# Altium PCB FlameClock_1.1.PcbDoc (part 2 of 2)
Units mm, origin at the board's own origin, x right, y up, seen from the top; angles counter-clockwise.
Board outline 139.1 x 139.1 mm, 2 copper layers (Top, Bottom); 164 components, 272 nets, 674 pads, 352 vias.
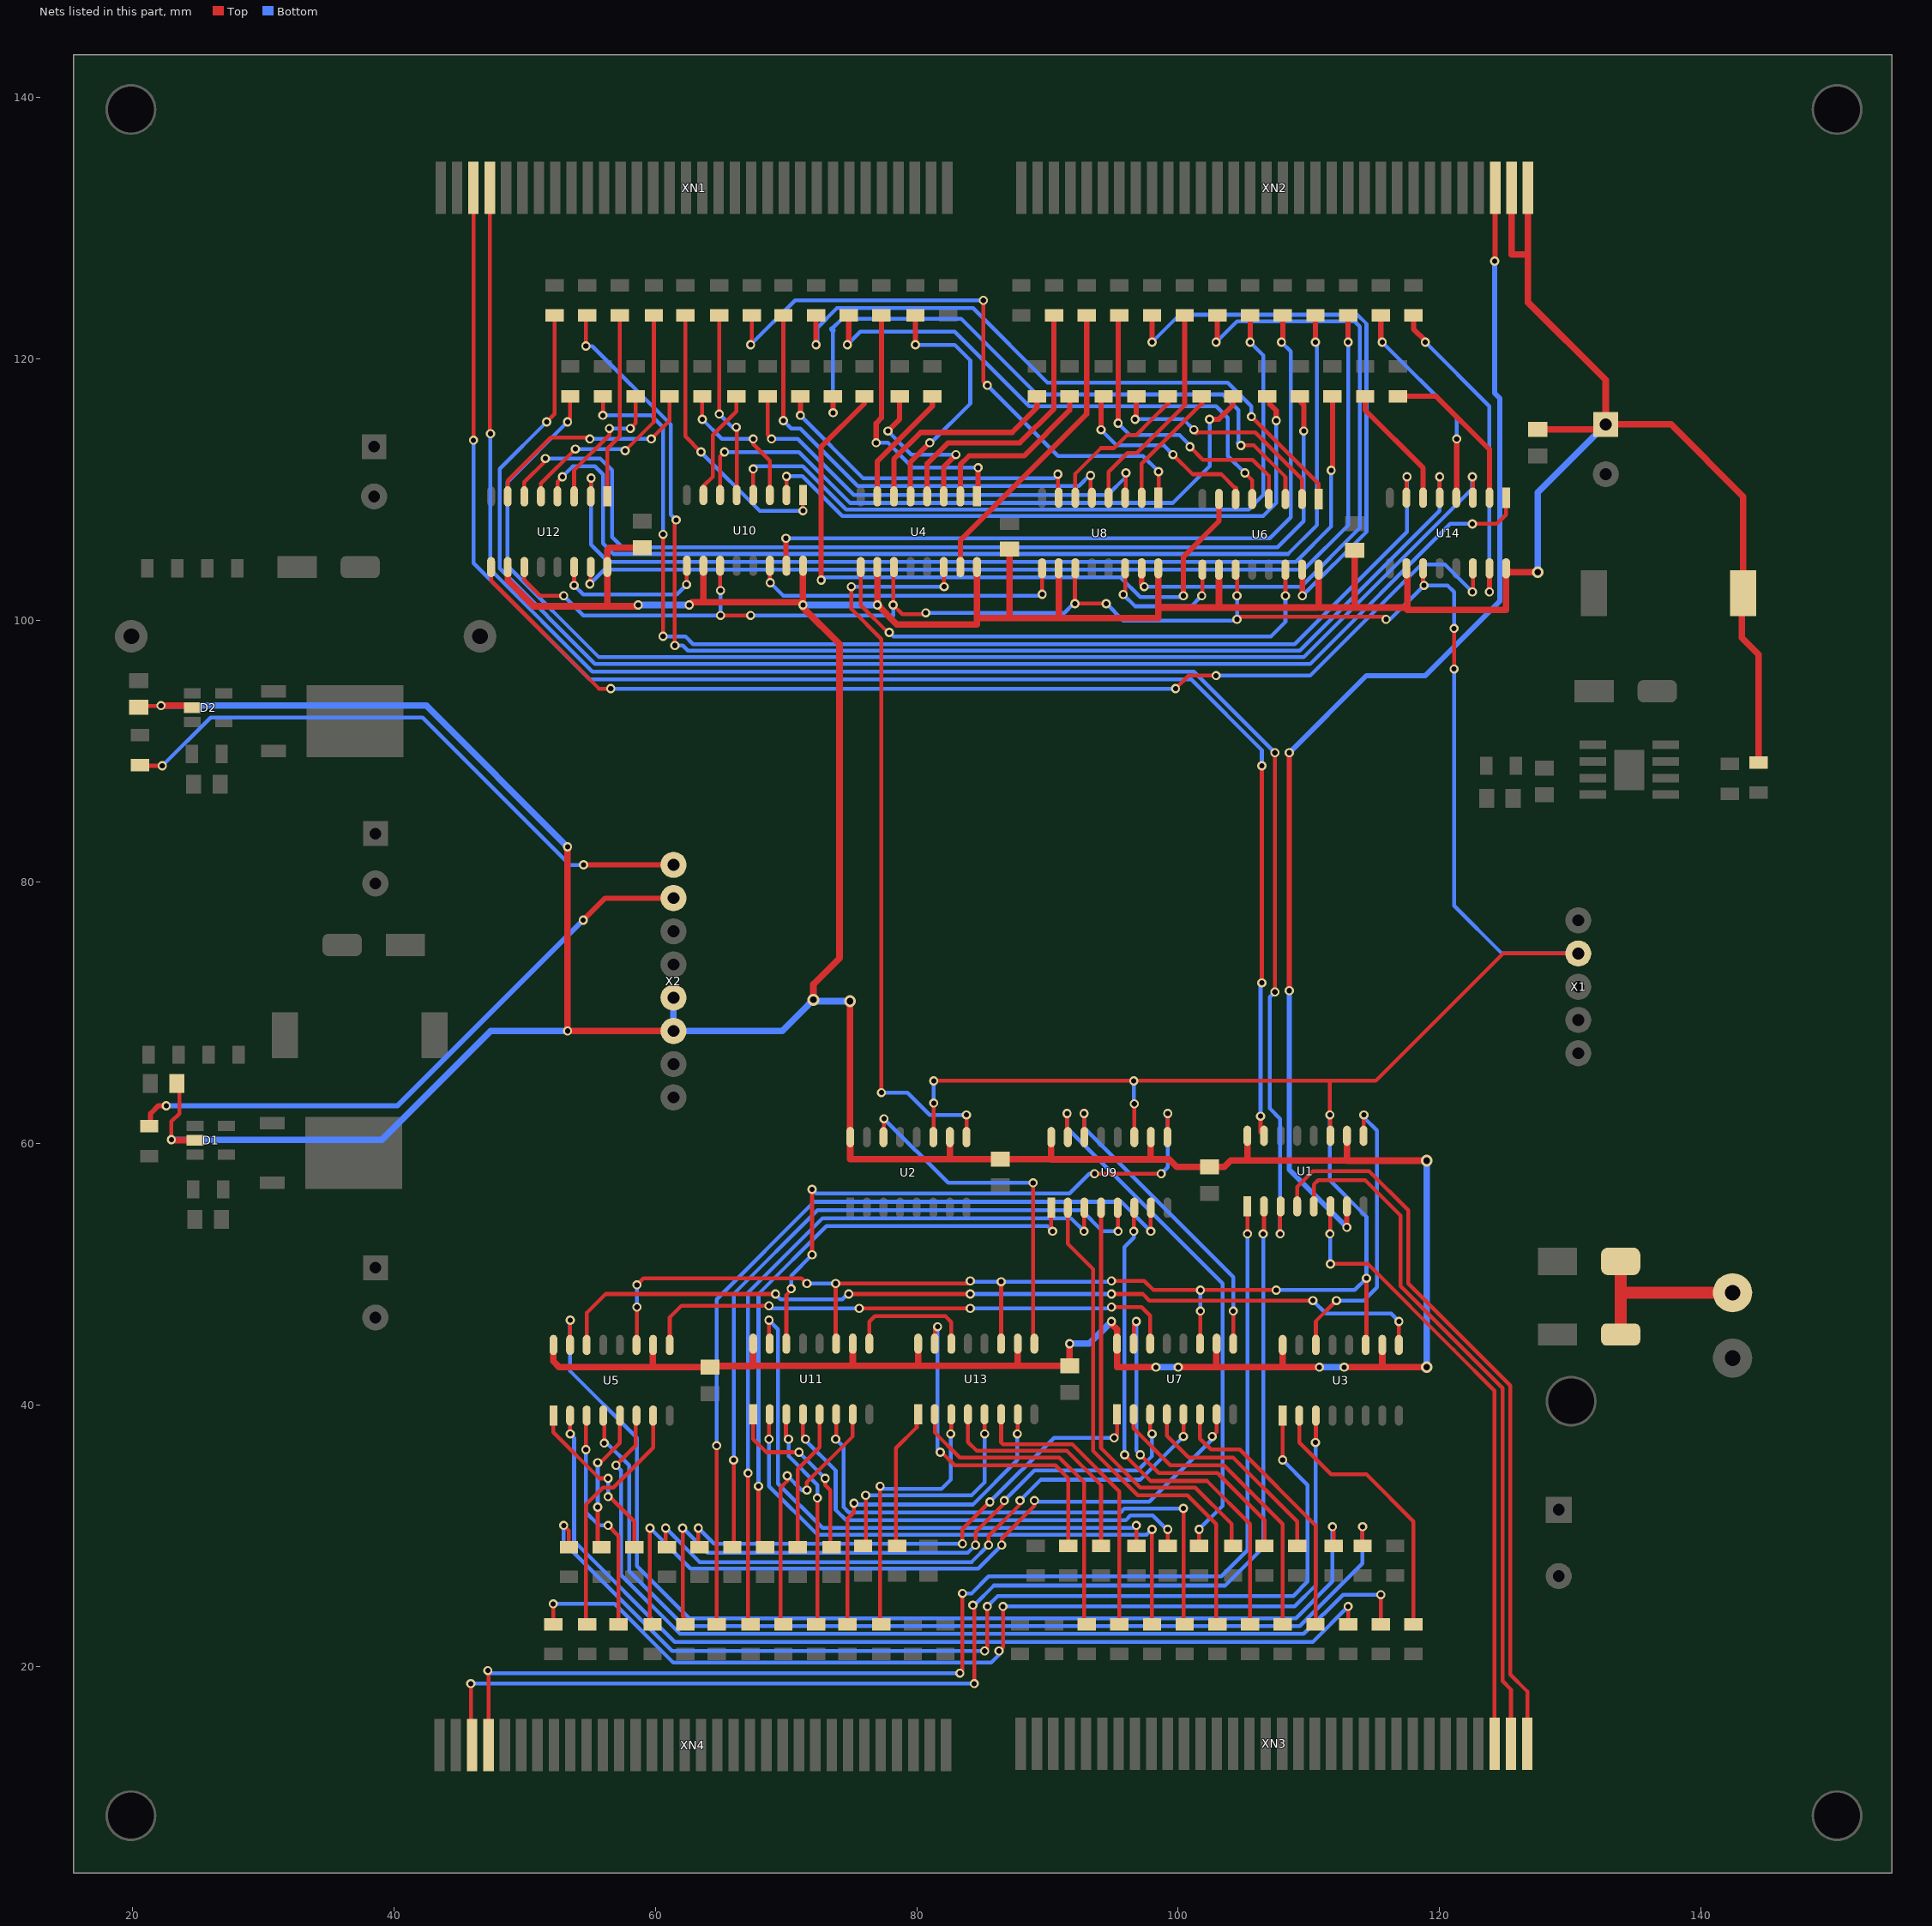
[diagram p2: the nets of this part, all layers, seen from the top]

## Via types
v1: diameter 0.7, hole 0.4, Top to Bottom, 340 vias
v2: diameter 0.9, hole 0.5, Top to Bottom, 12 vias

## Nets (pads, with @x,y where several pads share a name; then routed paths per layer and width w, separated by ;. In a path a pad name is that pad's centre, name@x,y a point inside that pad or via, vN(x,y) a via of type N, cw(c..) or ccw(c..) an arc to the next point about the centre after c; other vN are vias at no path point) (continued)
NetR10_2: R10.2 U3.1 | length 81
  Top w0.3: v1(53,30.8) 53.4,30.4 R10.2@53.4,29.143 ; v1(85.2,21.2) 85.4,21.4 v1(85.4,24.6) ; v1(107.99,35.81) U3.1@107.99,39.2
  Bottom w0.3: v1(53,30.8) 53,29.5 61.3,21.2 v1(85.2,21.2) ; v1(85.4,24.6) 86.2,25.4 108.8,25.4 109.9,26.5 109.9,33.9 v1(107.99,35.81)
NetR11_2: R11.2 U4.15 | length 23.3
  Top w0.4: U4.15@83.34,104.1 83.34,106.14 93,115.8 R11.2@93,123.357
NetR12_2: R12.2 U3.2 | length 21.2
  Top w0.3: U3.2@109.26,39.2 109.26,37.14 111.7,34.7 114.4,34.7 118,31.1 R12.2@118,23.243
NetR13_2: R13.2 U4.1 | length 20.8
  Top w0.4: v1(76.9,113.6) 76.9,115.1 77.3,115.5 R13.2@77.3,123.357 ; U4.1@84.61,109.5 84.6,109.51 84.7,109.61 v1(84.7,111.7)
  Bottom w0.3: v1(76.9,113.6) 77.8,113.6 79.7,111.7 v1(84.7,111.7)
NetR14_2: R14.2 U3.3 | length 79.2
  Top w0.3: R14.2@52.2,23.243 v1(52.2,24.8) ; v1(86.3,21.2) 86.6,21.5 v1(86.6,24.6) ; v1(110.5,37.14) 110.53,37.17 U3.3@110.53,39.2
  Bottom w0.3: v1(52.2,24.8) 56.9,24.8 61.4,20.3 85.7,20.3 86.3,20.9 v1(86.3,21.2) ; v1(86.6,24.6) 108.9,24.6 110.5,26.2 v1(110.5,37.14)
NetR15_2: R15.2 U4.2 | length 13.6
  Top w0.4: U4.2@83.34,109.5 83.34,111.94 84,112.6 88.2,112.6 91.7,116.1 R15.2@91.7,117.157
NetR16_2: R16.2 U4.3 | length 12.7
  Top w0.4: v1@77.9,114.5 v1(77.8,114.5) 78.7,115.4 R16.2@78.7,117.157 ; U4.3@82.07,109.5 82.07,111.77 v1(83,112.7)
  Bottom w0.3: v1(77.8,114.5) 79.6,112.7 v1(83,112.7)
NetR17_2: R17.2 U4.4 | length 21.1
  Top w0.4: U4.4@80.8,109.5 80.8,112 82.4,113.6 87.9,113.6 90.5,116.2 R17.2@90.5,123.357
NetR18_2: R18.2 U4.5 | length 19.3
  Top w0.4: U4.5@79.53,109.5 79.5,109.53 79.5,112.1 v1(81,113.6) ; v1(79.9,121.1) R18.2@79.9,123.357
  Bottom w0.3: v1(79.9,121.1) 82.9,121.1 84.1,119.9 84.1,116.598 v1@81.102,113.6
  Bottom w0.4: v1(81,113.6) v1@81.102,113.6
NetR19_2: R19.2 U4.6 | length 16.3
  Top w0.4: U4.6@78.26,109.5 78.26,112.36 80.3,114.4 87.3,114.4 89.2,116.3 R19.2@89.2,117.157
NetR20_2: R20.2 U4.7 | length 9.4
  Top w0.4: U4.7@76.99,109.5 76.99,112.19 81.2,116.4 R20.2@81.2,117.157
NetR21_2: R21.2 U5.15 | length 84.5
  Top w0.3: U5.15@53.49,44.6 53.5,44.61 v1(53.5,46.5) ; v1(111.8,30.7) 111.9,30.6 R21.2@111.9,29.243
  Bottom w0.3: v1(53.5,46.5) 53.5,42.6 58.6,37.5 58.6,27.7 62.6,23.7 109,23.7 111.8,26.5 v1(111.8,30.7)
NetR22_2: R22.2 U5.1 | length 13.1
  Top w0.3: U5.1@52.22,39.2 52.22,37.913 55.733,34.4 v1(56.4,34.4) ; v1(56.4,33) 56.5,33 58.4,31.1 R22.2@58.4,29.143
  Bottom w0.3: v1(56.4,33) v1(56.4,34.4)
NetR23_2: R23.2 U6.15 | length 44.7
  Top w0.4: v1(98,121.3) 97.9,121.3 98,121.4 R23.2@98,123.357 ; U6.15@109.47,103.9 109.4,103.83 109.5,103.73 v1(109.5,101.9)
  Bottom w0.3: v1(98,121.3) 100.1,123.4 113.707,123.4 114.4,122.707 114.4,106.8 v1(109.5,101.9)
NetR24_2: R24.2 U5.2 | length 74.6
  Top w0.3: U5.2@53.49,39.2 53.5,39.19 v1(53.5,37.8) ; R24.2@113,23.243 v1(113,24.6)
  Bottom w0.3: v1(53.5,37.8) 53.8,37.5 53.8,29.6 61.5,21.9 110.3,21.9 v1(113,24.6)
NetR25_2: R25.2 U6.1 | length 49.8
  Top w0.3: v1(105.6,115.6) 110.74,110.46 U6.1@110.74,109.3
  Top w0.4: v1(72.3,121.1) R25.2@72.3,123.357
  Bottom w0.3: v1@72.4,121.2 72.4,122.4 73.9,123.9 84.3,123.9 90,118.2 103.8,118.2 105.6,116.4 v1(105.6,115.6)
  Bottom w0.4: v1(72.3,121.1) v1@72.4,121.2
NetR26_2: R26.2 U5.3 | length 17.4
  Top w0.3: v1(54.7,36.6) 54.7,39.14 U5.3@54.76,39.2 ; v1(56.4,30.8) 57.2,30 R26.2@57.2,23.243
  Bottom w0.3: v1(54.7,36.6) 54.7,31.8 55.7,30.8 v1(56.4,30.8)
NetR27_2: R27.2 U6.2 | length 18
  Top w0.3: v1@101.4,114.4 105.9,114.4 109.47,110.83 U6.2@109.47,109.3
  Top w0.4: v1(96.7,115.4) 96.7,115.5 96.8,115.6 R27.2@96.8,117.157 ; v1(101.2,114.6) v1@101.4,114.4
  Bottom w0.3: v1(96.7,115.4) 100.4,115.4 v1(101.2,114.6)
NetR28_2: R28.2 U5.4 | length 76.9
  Top w0.3: U5.4@56.03,39.2 56.1,39.13 v1(56.1,37.1) ; R28.2@114.1,29.243 v1(114.1,30.7)
  Bottom w0.3: v1(56.1,37.1) 56.29,37.1 58,35.39 58,27.3 62.2,23.1 109.3,23.1 114.1,27.9 114.1,28.1 v1(114.1,30.7)
NetR29_2: R29.2 U6.3 | length 50.9
  Top w0.3: v1(104.8,113.4) 105.8,113.4 108.2,111 U6.3@108.2,109.3
  Top w0.4: v1(73.6,115.9) R29.2@73.6,117.157
  Bottom w0.3: 73.5,122.3 74.3,123.1 83.4,123.1 89.2,117.3 103.4,117.3 104.6,116.1 v1@104.6,113.6 ; v1(73.6,115.9) 73.6,122.2
  Bottom w0.4: 73.5,122.3 73.6,122.2 ; v1@104.6,113.6 v1(104.8,113.4)
NetR30_2: R30.2 U5.5 | length 11
  Top w0.3: v1(55.6,32.2) 55.6,29.443 R30.2@55.9,29.143 ; v1(55.6,35.6) 55.8,35.6 57.3,37.1 U5.5@57.3,39.2
  Bottom w0.3: v1(55.6,32.2) v1(55.6,35.6)
NetR31_2: R31.2 U6.4 | length 23.3
  Top w0.3: v1(100.9,113.3) 101.9,112.3 105.7,112.3 106.93,111.07 U6.4@106.93,109.3
  Top w0.4: v1(95.4,115.1) 95.4,123.257 R31.2@95.5,123.357
  Bottom w0.3: v1(95.4,115.1) 96.3,114.2 100.1,114.2 v1@100.9,113.4
  Bottom w0.4: v1(100.9,113.3) v1@100.9,113.4
NetR32_2: R32.2 U5.6 | length 76.5
  Top w0.3: v1(57,35.4) 58.5,36.9 58.5,39.13 U5.6@58.57,39.2 ; R32.2@115.5,23.243 v1(115.5,25.5)
  Bottom w0.3: v1(57,35.4) 57.4,35 57.4,27 61.9,22.5 109.6,22.5 112.6,25.5 v1(115.5,25.5)
NetR33_2: R33.2 U6.5 | length 41.5
  Top w0.3: v1(105.1,111.3) 105.66,110.74 U6.5@105.66,109.3
  Top w0.4: v1(74.7,121.1) 74.7,121.2 74.8,121.3 R33.2@74.8,123.357
  Bottom w0.3: v1(74.7,121.1) 75.7,122.1 82.9,122.1 88.6,116.4 102.9,116.4 103.8,115.5 103.8,112.6 v1(105.1,111.3)
NetR34_2: R34.2 U5.7 | length 18.6
  Top w0.3: R34.2@54.7,23.243 54.7,32.4 56,33.7 56.8,33.7 59.84,36.74 U5.7@59.84,39.2
NetR35_2: R35.2 U6.6 | length 15.6
  Top w0.3: v1(99.6,112.7) 101.1,111.2 103.3,111.2 104.39,110.11
  Top w0.4: v1(94.1,114.6) 94.1,116.957 R35.2@94.3,117.157 ; U6.6@104.39,109.3 104.39,110.11
  Bottom w0.3: v1(94.1,114.6) 95.3,113.4 98.9,113.4 v1(99.6,112.7)
NetR36_2: R36.2 U6.7 | length 52.4
  Top w0.4: v1(72.7,103.1) 72.7,113.3 76,116.6 R36.2@76,117.157 ; v1(100.4,101.9) 100.4,104.9 103.12,107.62 U6.7@103.12,109.3
  Bottom w0.3: v1(72.7,103.1) 72.9,103.3 95.6,103.3 97.1,101.8 100.3,101.8 v1(100.4,101.9)
NetR37_2: R37.2 U7.15 | length 25.7
  Top w0.3: U7.15@96.59,44.7 96.5,44.79 96.6,44.89 96.6,46.2 v1(96.8,46.4) ; v1(97.1,36.2) 98.5,34.8 103,34.8 106.6,31.2 R37.2@106.6,29.243
  Bottom w0.3: v1(96.8,46.4) 96.8,36.5 v1(97.1,36.2)
NetR38_2: R38.2 U7.1 | length 39.8
  Top w0.3: v1(63.3,30.6) 63.3,29.443 63.2,29.343 R38.2@63.4,29.143 ; v1(83.5,29.4) 83.5,30.5 v1(85.6,32.6) ; v1(95.1,37.5) 95.32,37.72 U7.1@95.32,39.3
  Bottom w0.3: v1(63.3,30.6) 64.5,29.4 v1(83.5,29.4) ; v1(85.6,32.6) 90.5,37.5 v1(95.1,37.5)
NetR39_2: R39.2 U8.15 | length 49.2
  Top w0.4: U8.15@97.21,104 97.2,103.99 97.2,102.8 v1(97.4,102.6) ; v1(102.9,121.3) 103,121.4 R39.2@103,123.357
  Bottom w0.3: v1(97.4,102.6) 109.4,102.6 113.9,107.1 113.9,122.5 113.5,122.9 104.5,122.9 v1(102.9,121.3)
NetR40_2: R40.2 U7.2 | length 23.2
  Top w0.3: U7.2@96.59,39.3 96.59,38.21 99.4,35.4 103.5,35.4 108,30.9 R40.2@108,23.243
NetR41_2: R41.2 U8.1 | length 46
  Top w0.3: v1(67.3,121.1) 67.4,121.2 R41.2@67.4,123.357 ; v1(85.1,124.5) 85.1,118.3 v1(85.4,118) ; U8.1@98.48,109.4 98.5,109.42 v1(98.5,111.4)
  Bottom w0.3: v1(67.3,121.1) 70.7,124.5 v1(85.1,124.5) ; v1(85.4,118) 90.8,112.6 97.3,112.6 v1(98.5,111.4)
NetR42_2: R42.2 U7.3 | length 51.3
  Top w0.3: v1(62.1,30.6) 62.1,23.843 62.4,23.543 62.2,23.343 R42.2@62.3,23.243 ; v1(84.5,29.3) 84.5,30.3 86.7,32.5 v1(86.7,32.7) ; U7.3@97.86,39.3 97.86,37.94 v1(98,37.8)
  Bottom w0.3: v1(62.1,30.6) 64,28.7 83.9,28.7 v1(84.5,29.3) ; v1(86.7,32.7) 89,35 96.9,35 98,36.1 v1(98,37.8)
NetR43_2: R43.2 U8.2 | length 9.7
  Top w0.3: U8.2@97.21,109.4 97.21,112 101.8,116.59
  Top w0.4: 101.8,116.59 R43.2@101.8,117.157
NetR44_2: R44.2 U7.4 | length 16.2
  Top w0.3: U7.4@99.13,39.3 99.13,37.67 100.8,36 104.2,36 109.1,31.1 R44.2@109.1,29.243
NetR45_2: R45.2 U8.3 | length 35.1
  Top w0.3: R45.2@68.6,117.157 68.6,114.2 v1(68.9,113.9) v1@69,113.8 ; U8.3@96,109.46 v1(96,111.3)
  Bottom w0.3: v1(68.9,113.9) 70.9,113.9 75.2,109.6 94.6,109.6 96,111 v1(96,111.3)
NetR46_2: R46.2 U7.5 | length 48.4
  Top w0.3: v1(60.8,30.6) 60.8,29.243 R46.2@60.9,29.143 ; v1(85.5,29.3) 85.5,30 87.9,32.4 v1(87.9,32.7) ; v1(100.4,37.6) U7.5@100.4,39.3
  Bottom w0.3: v1(60.8,30.6) 63.4,28 84.2,28 v1(85.5,29.3) ; v1(87.9,32.7) 89.5,34.3 97.1,34.3 v1(100.4,37.6)
NetR47_2: R47.2 U8.4 | length 16.8
  Top w0.3: U8.4@94.67,109.4 94.67,111.37 96.128,112.828 96.828,112.828 100.5,116.5
  Top w0.4: 100.5,116.5 R47.2@100.5,123.357
NetR48_2: R48.2 U7.6 | length 21
  Top w0.3: U7.6@101.67,39.3 101.67,37.43 102.5,36.6 104.7,36.6 110.5,30.8 R48.2@110.5,23.243
NetR49_2: R49.2 U8.5 | length 35.7
  Top w0.3: v1(69.8,115.3) R49.2@69.8,123.357 ; U8.5@93.3,109.5 v1(93.3,111.1)
  Top w0.4: U8.5@93.3,109.5 U8.5@93.4,109.4
  Bottom w0.3: v1(69.8,115.3) 70.4,114.7 71.1,114.7 75.5,110.3 92.4,110.3 v1@93.2,111.1
  Bottom w0.4: v1@93.2,111.1 v1(93.3,111.1)
NetR50_2: R50.2 U7.7 | length 58.5
  Top w0.3: v1(59.6,30.6) 59.6,23.443 R50.2@59.8,23.243 ; v1(86.5,29.3) 86.5,29.8 89,32.3 v1(89,32.7) ; v1(102.6,37.6) 102.94,37.94 U7.7@102.94,39.3
  Bottom w0.3: v1(59.6,30.6) 62.7,27.5 84.7,27.5 v1(86.5,29.3) ; v1(89,32.7) 89.1,32.6 97.8,32.6 102.6,37.4 v1(102.6,37.6)
NetR51_2: R51.2 U8.6 | length 11.7
  Top w0.3: U8.6@92.13,109.4 92.13,111.23 94.1,113.2 95.1,113.2 96.1,114.2 96.8,114.2 97.9,115.3 99.2,116.6
  Top w0.4: 99.2,116.6 R51.2@99.2,117.157
NetR52_2: R52.2 U8.7 | length 25.1
  Top w0.3: U8.7@90.8,109.46 v1(90.8,111.2)
  Top w0.4: v1(71.1,115.7) R52.2@71.1,117.157 ; U8.7@90.8,109.46 U8.7@90.86,109.4
  Bottom w0.3: v1(71.1,115.7) 75.9,110.9 90.5,110.9 v1(90.8,111.2)
NetR53_2: R53.2 U9.15 | length 40.6
  Top w0.3: v1(91.5,62.3) 91.5,60.56 U9.15@91.56,60.5 ; R53.2@101.6,29.243 v1(101.6,30.5)
  Bottom w0.3: v1(91.5,62.3) 91.5,61.2 103.4,49.3 103.4,32.3 v1(101.6,30.5)
NetR54_2: R54.2 U9.1 | length 46.2
  Top w0.3: v1(67.9,33.8) 67.9,29.643 R54.2@68.4,29.143 ; U9.1@90.29,55.1 90.29,53.41 v1(90.4,53.3)
  Bottom w0.3: v1(67.9,33.8) 67.9,48.5 73.1,53.7 90,53.7 v1(90.4,53.3)
NetR55_2: R55.2 U10.15 | length 57.2
  Top w0.4: v1(70,106.3) 70,104.24 U10.15@70.04,104.2 ; v1(107.9,121.3) 108,121.3 R55.2@108,123.357
  Bottom w0.3: v1(70,106.3) 107,106.3 108.6,107.9 108.6,120.6 v1(107.9,121.3)
NetR56_2: R56.2 U9.2 | length 38.8
  Top w0.3: U9.2@91.56,55.1 91.56,52.34 93.5,50.4 93.5,36.5 96.9,33.1 100.7,33.1 102.9,30.9 102.9,23.343 R56.2@103,23.243
NetR57_2: R57.2 U10.1 | length 21.8
  Top w0.3: R57.2@62.3,123.357 62.3,114.1 v1(63.5,112.9) ; v1(71.3,108.4) 71.3,109.59 U10.1@71.31,109.6
  Bottom w0.3: v1(63.5,112.9) 68,108.4 v1(71.3,108.4)
NetR58_2: R58.2 U9.3 | length 55.7
  Top w0.3: v1(67.1,34.8) 67.1,23.443 R58.2@67.3,23.243 ; v1(92.8,53.3) 92.8,55.07 U9.3@92.83,55.1
  Bottom w0.3: v1(67.1,34.8) 67.1,48.6 72.8,54.3 91.8,54.3 v1(92.8,53.3)
NetR59_2: R59.2 U10.2 | length 49
  Top w0.3: U10.2@70.04,109.6 v1(70.04,111.04)
  Top w0.4: R59.2@106.8,117.157 107,116.957 107,116.557 107.5,116.057 v1(107.5,115.3)
  Bottom w0.3: v1(70.04,111.04) 71.26,111.04 74.3,108 106.5,108 107.5,109 v1(107.5,115.3)
NetR60_2: R60.2 U9.4 | length 32.5
  Top w0.3: U9.4@94.1,55.1 94.1,36.7 97.1,33.7 101.3,33.7 104.1,30.9 R60.2@104.1,29.243
NetR61_2: R61.2 U10.3 | length 11.1
  Top w0.3: v1(63.6,115.4) R61.2@63.6,117.157 ; v1(67.5,113.9) 67.5,113.5 68.77,112.23 U10.3@68.77,109.6
  Bottom w0.3: v1(63.6,115.4) 65.1,113.9 v1(67.5,113.9)
NetR62_2: R62.2 U9.5 | length 53.9
  Top w0.3: R62.2@65.9,29.143 66,29.243 v1(66,35.8) ; U9.5@95.37,55.1 95.4,55.07 v1(95.4,53.3)
  Bottom w0.3: v1(66,35.8) 66,48.5 72.4,54.9 92.6,54.9 94.2,53.3 v1(95.4,53.3)
NetR63_2: R63.2 U10.4 | length 57.2
  Top w0.3: U10.4@67.5,109.6 v1(67.5,111.6)
  Top w0.4: v1(105.5,121.3) 105.6,121.3 105.5,121.4 R63.2@105.5,123.357
  Bottom w0.3: v1@67.5,111.7 67.6,111.8 71.3,111.8 74.6,108.5 105.4,108.5 106.5,109.6 106.5,120.3 v1(105.5,121.3)
NetR64_2: R64.2 U9.6 | length 38.7
  Top w0.3: v1(95.9,36.2) 97.9,34.2 102.2,34.2 105.5,30.9 R64.2@105.5,23.243 ; v1(96.6,53.3) 96.6,55.06 U9.6@96.64,55.1
  Bottom w0.3: v1(95.9,36.2) 95.9,52.1 96.6,52.8 v1(96.6,53.3)
NetR65_2: R65.2 U10.5 | length 14.5
  Top w0.3: v1(64.9,115.8) R65.2@64.9,123.357 ; v1(66.2,114.8) 66.23,114.77 U10.5@66.23,109.6
  Bottom w0.3: v1(64.9,115.8) 65.9,114.8 v1(66.2,114.8)
NetR66_2: R66.2 U9.7 | length 63.9
  Top w0.3: R66.2@64.7,23.243 v1(64.7,36.9) ; v1(97.9,53.3) 97.9,55.09 U9.7@97.91,55.1
  Bottom w0.3: v1(64.7,36.9) 64.7,48.1 72.15,55.55 95.65,55.55 v1(97.9,53.3)
NetR67_2: R67.2 U10.6 | length 49.8
  Top w0.3: U10.6@64.96,109.6 64.96,112.56 v1(65.3,112.9)
  Top w0.4: v1(102.4,115.4) 103.1,115.4 104.2,116.5 R67.2@104.2,117.157
  Bottom w0.3: v1(65.3,112.9) 71,112.9 74.9,109 99.6,109 102.4,111.8 v1(102.4,115.4)
NetR68_2: R68.2 U10.7 | length 8.6
  Top w0.3: U10.7@63.69,109.6 63.69,110.29 64.4,111 64.4,114.2 66.2,116 R68.2@66.2,117.157
NetR69_2: R69.2 U11.15 | length 45.1
  Top w0.3: v1(68.7,46.5) 68.7,44.76 U11.15@68.76,44.7 ; R69.2@96.8,29.243 v1(96.8,30.8)
  Bottom w0.3: v1(68.7,46.5) 69.4,45.8 69.4,34 72.8,30.6 96.6,30.6 v1(96.8,30.8)
NetR70_2: R70.2 U11.1 | length 14.1
  Top w0.3: U11.1@67.49,39.3 67.49,37.41 68.5,36.4 v1(71,36.4) ; v1(73,34.4) 73,33.9 73.4,33.5 R70.2@73.4,29.143
  Bottom w0.3: v1(71,36.4) v1(73,34.4)
NetR71_2: R71.2 U12.15 | length 77.2
  Top w0.3: v1(55,102.8) 55.07,102.87 U12.15@55.07,104.1
  Top w0.4: v1(113,121.3) R71.2@113,123.357
  Bottom w0.3: v1(55,102.8) 56.1,103.9 109.6,103.9 113,107.3 v1(113,121.3)
NetR72_2: R72.2 U11.2 | length 43.2
  Top w0.3: v1(68.7,37.4) U11.2@68.7,38.74 ; R72.2@98,23.243 v1(98,30.5)
  Bottom w0.3: v1(68.7,37.4) 68.7,33.8 72.4,30.1 97.6,30.1 v1(98,30.5)
NetR73_2: R73.2 U12.1 | length 14.3
  Top w0.3: U12.1@56.34,109.5 56.34,113.14 57.3,114.1 R73.2@57.3,123.357
NetR74_2: R74.2 U11.3 | length 17.2
  Top w0.3: U11.3@70.03,39.3 70,39.27 70,37.6 v1(70.2,37.4) ; R74.2@72.3,23.243 72.2,23.343 72.4,23.543 v1(72.4,32.9)
  Bottom w0.3: v1(70.2,37.4) 70.2,36.1 72.4,33.9 v1(72.4,32.9)
NetR75_2: R75.2 U12.2 | length 74.9
  Top w0.3: v1@55,111 v1(55.1,110.9) 55.1,109.53 U12.2@55.07,109.5
  Top w0.4: v1(111.7,111.5) 111.8,111.6 R75.2@111.8,117.157
  Bottom w0.3: v1(55.1,110.9) 55.1,105.8 56.4,104.5 109,104.5 111.7,107.2 v1(111.7,111.5)
NetR76_2: R76.2 U11.4 | length 36
  Top w0.3: U11.4@71.3,39.3 71.3,37.6 v1(71.5,37.4) ; R76.2@99.2,29.243 99.1,29.343 99.2,29.443 v1(99.2,30.5)
  Bottom w0.3: v1(71.5,37.4) 71.5,37.3 73.8,35 73.8,32 74.6,31.2 96,31.2 96.35,31.55 98.05,31.55 99.1,30.5 v1(99.2,30.5)
NetR77_2: R77.2 U12.3 | length 10.5
  Top w0.3: U12.3@53.8,109.5 53.8,111.5 56.5,114.2 v1(56.5,114.7) ; v1(58.1,114.7) 58.5,115.1 R77.2@58.5,117.157
  Bottom w0.3: v1(56.5,114.7) v1(58.1,114.7)
NetR78_2: R78.2 U11.5 | length 10.8
  Top w0.3: R78.2@70.9,29.143 70.9,35.1 72.57,36.77 U11.5@72.57,39.3
NetR79_2: R79.2 U12.4 | length 82.6
  Top w0.3: U12.4@52.53,109.5 52.53,110.63 v1(52.9,111)
  Top w0.4: v1(110.5,121.3) R79.2@110.5,123.357
  Bottom w0.3: v1(52.9,111) 53.7,111.8 55.39,111.8 56,111.19 56,105.9 56.8,105.1 108.4,105.1 110.6,107.3 v1@110.6,121.2
  Bottom w0.4: v1(110.5,121.3) v1@110.6,121.2
NetR80_2: R80.2 U11.6 | length 42.6
  Top w0.3: v1(73.8,37.4) 73.8,37.6 73.84,37.64 U11.6@73.84,39.3 ; v1(100.4,32.1) 100.4,23.343 R80.2@100.5,23.243
  Bottom w0.3: v1(73.8,37.4) 74.4,36.8 74.4,32.2 74.8,31.8 95.6,31.8 95.9,32.1 v1(100.4,32.1)
NetR81_2: R81.2 U12.5 | length 19.8
  Top w0.3: U12.5@51.26,109.5 51.26,110.486 v1(53.9,113.126) ; v1(57.7,113) 59.9,115.2 R81.2@59.9,123.357
  Bottom w0.3: v1(53.9,113.126) 57.574,113.126 v1(57.7,113)
NetR82_2: R82.2 U11.7 | length 20.9
  Top w0.3: R82.2@69.8,23.243 69.6,23.443 69.6,33.7 70.1,34.2 v1(70.1,34.6) ; v1(71.6,33.5) 71.6,34.1 75.11,37.61 U11.7@75.11,39.3
  Bottom w0.3: v1(70.1,34.6) 71.2,33.5 v1(71.6,33.5)
NetR83_2: R83.2 U12.6 | length 78
  Top w0.3: U12.6@49.99,109.5 49.99,110.59 51.6,112.2 v1(51.6,112.4)
  Top w0.4: R83.2@109.3,117.157 109.121,116.979 109.6,116.5 v1(109.6,114.5)
  Bottom w0.3: v1(51.6,112.4) 55.8,112.4 56.7,111.5 56.7,106.4 57.5,105.6 107.6,105.6 109.6,107.6 v1(109.6,114.5)
NetR84_2: R84.2 U12.7 | length 17.4
  Top w0.3: U12.7@48.72,109.5 48.72,110.72 52,114 54.9,114 v1(55,113.9) ; v1(59.7,113.9) 61.1,115.3 R84.2@61.1,117.157
  Bottom w0.3: v1(55,113.9) v1(59.7,113.9)
NetR85_2: R85.2 U13.15 | length 26.9
  Top w0.3: U13.15@81.38,44.7 81.38,45.78 v1(81.6,46) ; v1(81.8,36.4) 81.9,36.4 82.9,35.4 90.6,35.4 91.6,34.4 R85.2@91.6,29.243
  Bottom w0.3: v1(81.6,46) 81.6,36.6 v1(81.8,36.4)
NetR86_2: R86.2 U13.1 | length 10.8
  Top w0.3: R86.2@78.4,29.243 78.4,36.7 80,38.3 80,39.19 U13.1@80.11,39.3
NetR87_2: R87.2 U14.15 | length 25.4
  Top w0.4: R87.2@118,123.357 118,122.3 118.9,121.4 v1(118.9,121.3) ; v1(123.8,102.2) 123.8,103.99 U14.15@123.81,104
  Bottom w0.3: v1(118.9,121.3) 123.8,116.4 v1(123.8,102.2)
NetR88_2: R88.2 U13.2 | length 25.3
  Top w0.3: U13.2@81.38,39.3 81.38,37.905 83.285,36 90.9,36 92.8,34.1 92.8,23.443 R88.2@93,23.243
NetR89_2: R89.2 U14.1 | length 107.1
  Top w0.3: v1(51.7,115.2) 52.3,115.8 R89.2@52.3,123.357 ; v1(122.5,107.4) 124.367,107.4 125.08,108.113 U14.1@125.08,109.4
  Bottom w0.3: v1(51.7,115.2) 48.1,111.6 48.1,104 55.4,96.7 110.1,96.7 120.8,107.4 v1(122.5,107.4)
NetR90_2: R90.2 U13.3 | length 21.4
  Top w0.3: v1(77.2,33.8) 77.2,23.343 R90.2@77.3,23.243 ; v1(82.6,37.8) 82.65,37.85 U13.3@82.65,39.3
  Bottom w0.3: v1(77.2,33.8) 77.4,33.6 81.9,33.6 82.6,34.3 v1(82.6,37.8)
NetR91_2: R91.2 U14.2 | length 12.4
  Top w0.4: R91.2@116.8,117.157 119.743,117.157 123.81,113.09 U14.2@123.81,109.4
NetR92_2: R92.2 U13.4 | length 18.3
  Top w0.3: U13.4@83.92,39.3 83.92,37.18 84.6,36.5 91.5,36.5 94.1,33.9 R92.2@94.1,29.243
NetR93_2: R93.2 U14.3 | length 99.5
  Top w0.3: v1(53.3,115.2) 53.5,115.4 R93.2@53.5,117.157 ; v1(122.5,111) 122.54,110.96 U14.3@122.54,109.4
  Bottom w0.3: v1(53.3,115.2) 48.7,110.6 48.7,104.2 55.7,97.2 109.6,97.2 122.5,110.1 v1(122.5,111)
NetR94_2: R94.2 U13.5 | length 18.7
  Top w0.3: R94.2@75.9,29.243 76.1,29.443 v1(76.1,33.1) ; U13.5@85.19,39.3 85.19,37.81 v1(85.2,37.8)
  Bottom w0.3: v1(76.1,33.1) 84.2,33.1 85.2,34.1 v1(85.2,37.8)
NetR95_2: R95.2 U14.4 | length 16.1
  Top w0.4: R95.2@115.5,123.357 115.5,121.4 v1(115.6,121.3) ; U14.4@121.2,109.67 121.3,109.77 v1(121.3,113.9)
  Bottom w0.3: v1(115.6,121.3) 121.3,115.6 v1(121.3,113.9)
NetR96_2: R96.2 U13.6 | length 22.9
  Top w0.3: U13.6@86.46,39.3 86.46,37.14 86.6,37 91.9,37 95.5,33.4 R96.2@95.5,23.243
NetR97_2: R97.2 U14.5 | length 95.8
  Top w0.3: v1(54.7,121) 54.7,123.257 R97.2@54.8,123.357 ; v1(61.5,98.1) 61.5,107.6 v1(61.6,107.7) ; U14.5@120,109.4 v1(120,111)
  Bottom w0.3: v1(54.7,121) 55.2,121 61.2,115 61.2,108.1 v1(61.6,107.7) ; v1(61.5,98.1) 62.1,98.1 62.5,97.7 109.3,97.7 120,108.4 v1(120,111)
NetR98_2: R98.2 U13.7 | length 27
  Top w0.3: R98.2@74.7,23.243 74.8,23.343 74.7,23.443 74.7,31.3 75.2,31.8 v1(75.2,32.5) ; v1(87.7,37.8) 87.73,37.83 U13.7@87.73,39.3
  Bottom w0.3: v1(75.2,32.5) 75.3,32.4 84.3,32.4 87.7,35.8 v1(87.7,37.8)
NetR99_2: R99.2 U14.6 | length 9.6
  Top w0.4: R99.2@114.3,117.157 114.3,116.1 118.73,111.67 U14.6@118.73,109.4
NetR100_2: R100.2 U14.7 | length 89
  Top w0.3: v1(56,115.7) R100.2@56,117.157 ; v1(60.6,98.8) v1(60.6,106.6) ; U14.7@117.46,109.4 117.46,110.96 v1(117.5,111)
  Bottom w0.3: v1(56,115.7) 59.7,115.7 60.6,114.8 v1(60.6,106.6) ; v1(60.6,98.8) 62.3,98.8 62.9,98.2 108.9,98.2 117.5,106.8 v1(117.5,111)
NetR113_2: 
NetR118_2: 
NetR123_2: 
NetU1_9: U1.9 U3.14 | length 22.9
  Top w0.3: U3.14@110.53,44.6 110.53,46.43 v1(112.1,48) ; U1.9@114.18,60.6 114.1,60.68 114.2,60.78 v1(114.2,62.2)
  Bottom w0.3: v1(112.1,48) 114.2,48 115.2,49 115.2,61 114.2,62 v1(114.2,62.2)
NetU2_9: U2.9 U4.14 | length 57.2
  Top w0.3: v1(75,102.6) 75,100.9 77.3,98.6 v1(77.3,63.9) ; U4.14@82.07,104.1 82.07,102.63 v1(82.1,102.6) ; v1(83.8,62.2) 83.81,62.19 U2.9@83.81,60.5
  Bottom w0.3: v1(75,102.6) v1(82.1,102.6) ; v1(77.3,63.9) 79.3,63.9 81,62.2 v1(83.8,62.2)
NetU3_9: U3.9 U5.14 | length 68.2
  Top w0.3: U5.14@54.76,44.6 54.76,47.06 56.2,48.5 v1(69.2,48.5) ; v1(74.8,48.5) v1(84.1,48.5) ; v1(94.9,48.5) 97.3,48.5 97.8,48 v1(110.3,48) ; U3.9@116.88,44.6 v1(116.88,46.4)
  Bottom w0.3: v1(69.2,48.5) 69.6,48.1 74.3,48.1 74.7,48.5 v1(74.8,48.5) ; v1(84.1,48.5) v1(94.9,48.5) ; v1(110.3,48) 111.3,47 116.28,47 v1(116.88,46.4)
NetU4_9: U4.9 U6.14 | length 41
  Top w0.3: U4.9@75.72,104.1 75.72,101.18 77.9,99 v1(77.9,99.1) ; v1(108.2,101.9) U6.14@108.2,103.9
  Bottom w0.3: v1(77.9,99.1) 78.2,98.8 107.1,98.8 108.2,99.9 v1(108.2,101.9)
NetU5_9: U5.9 U7.14 | length 41.8
  Top w0.3: U5.9@61.11,44.6 61.11,46.71 62,47.6 v1(68.7,47.6) ; v1(75.6,47.4) v1(84.1,47.4) ; v1(94.9,47.5) 97.2,47.5 97.86,46.84 U7.14@97.86,44.7
  Bottom w0.3: v1(68.7,47.6) 68.9,47.4 v1(75.6,47.4) ; v1(84.1,47.4) 94.8,47.4 v1(94.9,47.5)
NetU6_9: U6.9 U8.14 | length 10.8
  Top w0.3: v1(95.8,102) 95.94,102.14 U8.14@95.94,104 ; v1(101.8,101.9) 101.85,101.95 U6.9@101.85,103.9
  Bottom w0.3: v1(95.8,102) 96.7,101.1 101,101.1 v1(101.8,101.9)
NetU7_9: U7.9 U9.14 | length 24.1
  Top w0.3: v1(92.8,62.3) 92.8,60.53 U9.14@92.83,60.5 ; U7.9@104.21,44.7 v1(104.21,47.2)
  Bottom w0.3: v1(92.8,62.3) 92.8,61.2 104.21,49.79 v1(104.21,47.2)
NetU8_9: U8.9 U10.14 | length 24.6
  Top w0.3: U10.14@68.77,104.2 68.77,102.93 v1(68.8,102.9) ; U8.9@89.59,104 89.59,102.01 v1(89.6,102.02)
  Bottom w0.3: v1(68.8,102.9) 69.8,101.9 89.48,101.9 v1(89.6,102.02)
NetU9_9: U9.9 U11.14 | length 46.7
  Top w0.3: U11.14@70.03,44.7 70.03,48.43 70.4,48.8 v1(70.4,48.9) ; v1(72,51.5) v1(72,56.5) ; v1(93.6,57.7) v1(98.7,57.7) ; U9.9@99.18,60.5 99.2,60.52 v1(99.2,62.3)
  Bottom w0.3: v1(70.4,48.9) 70.4,49.9 v1(72,51.5) ; v1(72,56.5) 72.3,56.2 91.7,56.2 93.2,57.7 v1(93.6,57.7) ; v1(98.7,57.7) 99.2,58.2 v1(99.2,62.3)
NetU10_9: U10.9 U12.14 | length 12.1
  Top w0.3: v1(53.8,102.7) U12.14@53.8,104.1 ; v1(62.4,102.76) 62.42,102.78 U10.9@62.42,104.2
  Bottom w0.3: v1(53.8,102.7) 54.5,102 61.64,102 v1(62.4,102.76)
NetU11_9: U11.9 U13.14 | length 10
  Top w0.3: U11.9@76.38,44.7 76.38,46.38 76.8,46.8 82.2,46.8 82.65,46.35 U13.14@82.65,44.7
NetU12_9: U12.9 U14.14 | length 86.1
  Top w0.3: U12.9@47.45,104.1 47.45,103.05 55.7,94.8 v1(56.6,94.8) ; v1(99.8,94.8) 100.8,95.8 v1(102.9,95.8) ; v1(122.5,102.2) 122.54,102.24 U14.14@122.54,104
  Bottom w0.3: v1(56.6,94.8) v1(99.8,94.8) ; v1(102.9,95.8) 110.1,95.8 118.6,104.3 120.4,104.3 v1(122.5,102.2)
NetVD1_2: VD1.2 VD5.2 X3.1 | length 14.5
  Top w0.9: VD5.2@133.84,45.4 133.84,48.6 ; VD1.2@133.84,51 VD1.2@133.84,50.528 ; VD1.2@134.112,50.8 VD1.2@133.84,50.528 ; X3.1@142.4,48.6 133.84,48.6 ; 133.84,48.6 VD1.2@133.84,50.528
PGC: 
PGD: 
"Register conn": U2.14 U13.9 | length 27.2
  Top w0.3: U2.14@77.46,60.5 77.5,60.54 v1(77.5,61.9) ; v1(88.9,57) 88.9,44.8 U13.9@89,44.7
  Bottom w0.3: v1(77.5,61.9) 82.4,57 v1(88.9,57)
RX_PROG: 
Shift: U1.11 U2.11 U3.11 U4.11 U5.11 U6.11 U7.11 U8.11 U9.11 U10.11 U11.11 U12.11 U13.11 U14.11 X1.2 | length 286.8
  Top w0.3: U12.11@49.99,104.1 49.99,103.11 51.2,101.9 v1(53,101.9) ; U5.11@58.57,44.6 58.6,44.63 v1(58.6,47.5) ; v1@58.6,49.4 v1(58.6,49.2) 59.1,49.7 71.2,49.7 v1(71.6,49.3) ; U10.11@64.96,104.2 64.96,102.34 v1(65,102.3) ; v1(65,100.4) v1(67.3,100.4) ; U11.11@73.84,44.7 73.8,44.74 v1(73.8,49.3) 83.9,49.3 v1(84.1,49.5) ; U4.11@78.26,104.1 78.2,104.04 v1(78.2,101.2) 78.9,100.5 80.6,100.5 v1(80.7,100.6) ; U2.11@81.27,60.5 81.3,60.53 v1(81.3,63.1) ; v1(81.3,64.8) v1(96.6,64.8) 111.7,64.8 ; U13.11@86.46,44.7 v1(86.46,49.44) ; U8.11@92.13,104 92.1,103.97 92.2,103.87 92.1,103.77 v1(92.1,101.3) v1(94.5,101.3) ; v1(94.9,49.5) 97.4,49.5 98.1,48.8 v1(101.7,48.8) v1(107.5,48.8) ; U9.11@96.64,60.5 v1(96.64,63.04) ; U7.11@101.67,44.7 101.7,44.73 v1(101.7,47.2) ; U6.11@104.39,103.9 104.5,103.79 v1(104.5,101.9) ; v1(104.5,100.1) 104.7,100.3 115.7,100.3 v1(115.9,100.1) ; U1.11@111.64,60.6 111.64,62.16 v1(111.6,62.2) 111.6,64.7 111.7,64.8 ; U3.11@114.34,44.6 114.4,44.66 v1(114.4,49.7) ; U14.11@118.73,104 118.73,102.77 v1(118.8,102.7) ; v1(121.1,96.3) v1(121.1,99.4) ; X1.2@130.6,74.54 124.84,74.54 115.1,64.8 111.7,64.8
  Bottom w0.3: v1(53,101.9) 54.5,100.4 v1(65,100.4) v1(65,102.3) ; v1(58.6,47.5) v1(58.6,49.2) ; v1(67.3,100.4) 78.2,100.4 v1(78.2,101.2) ; v1(71.6,49.3) v1(73.8,49.3) ; v1(80.7,100.6) 91.3,100.6 92,101.3 v1(92.1,101.3) ; v1(81.3,63.1) v1(81.3,64.8) ; v1(84.1,49.5) 84.16,49.44 v1(86.46,49.44) 94.84,49.44 v1(94.9,49.5) ; v1(94.5,101.3) 95.8,100 104.4,100 v1(104.5,100.1) v1(104.5,101.9) v1@104.4,101.8 ; v1(96.6,64.8) 96.6,63.08 v1(96.64,63.04) ; v1(101.7,47.2) v1(101.7,48.8) ; v1(107.5,48.8) 113.5,48.8 v1(114.4,49.7) 114.4,54.4 111.6,57.2 v1(111.6,62.2) ; v1(115.9,100.1) 116.2,100.1 v1(118.8,102.7) 120.6,102.7 121.1,102.2 v1(121.1,99.4) ; v1(121.1,96.3) 121.1,78.2 124.76,74.54 X1.2@130.6,74.54
StepUp1: R101.2 X2.7 | length 47.8
  Top w0.4: R101.2@21.4,61.343 21.4,62.3 22,62.9 v1(22.6,62.9) ; v1(54.5,77.1) 56.18,78.78 X2.7@61.4,78.78
  Bottom w0.4: v1(22.6,62.9) 40.3,62.9 v1(54.5,77.1)
StepUp2: R105.2 X2.8 | length 47.3
  Top w0.3: R105.2@20.6,88.957 20.657,88.9 v1(22.3,88.9)
  Top w0.4: v1(54.52,81.32) X2.8@61.4,81.32
  Bottom w0.3: v1(22.3,88.9) 26,92.6 42.2,92.6 53.48,81.32 v1(54.52,81.32)
  Bottom w0.5: X2.8@61.32,81.4 X2.8@61.4,81.32 X2.8@61.32,81.4
TX_PROG: 
U_PGM: 
V_BUS: 
VCC2: C1.1 C2.1 C3.1 C4.1 C8.1 C9.1 C10.1 C11.1 C17.1 C103.1 C104.1 D1.2 D2.2 L3.1 R109.1 U1.10 U1.16 U2.10 U2.16 U3.10 U3.16 U4.10 U4.16 U5.10 U5.16 U6.10 U6.16 U7.10 U7.16 U8.10 U8.16 U9.10 U9.16 U10.10 U10.16 U11.10 U11.16 U12.10 U12.16 U13.10 U13.16 U14.10 U14.16 X2.3 X2.4 XN2.31 XN2.32 | length 530.5
  Top w0.3: C104.1@20.5,93.484 22.184,93.484 v1(22.2,93.5) ; v1(23,60.3) 23,61.7 23.6,62.3 23.6,64.416 C103.1@23.416,64.6 C103.1@23.416,64.7
  Top w0.5: v1(22.2,93.5) 24.45,93.5 D2.2@24.6,93.35 ; v1(23,60.3) 23.05,60.25 D1.2@24.6,60.25 ; U12.10@48.72,104.1 48.72,103.08 50.7,101.1 56.34,101.1 ; U5.16@52.22,44.6 52.2,44.58 52.2,43.367 52.651,42.916 59.816,42.916 ; v1(53.3,82.7) v1(53.3,68.62) X2.3@61.4,68.62 ; v1@58.6,101.1 56.34,101.1 ; C1.1@59,105.584 56.516,105.584 56.34,105.408 U12.16@56.34,104.1 56.34,101.1 ; U5.10@59.84,44.6 59.816,44.576 59.816,42.916 ; v1(62.6,101.2) 62.8,101.4 63.6,101.4 63.69,101.49 U10.10@63.69,104.2 ; 63.78,101.4 71.1,101.4 v1(71.3,101.2) ; U11.16@67.49,44.7 67.49,42.99 ; U10.16@71.31,104.2 71.3,104.19 v1(71.3,101.2) ; v2(72.1,71) 72.1,72.2 74.1,74.2 74.1,98.2 71.3,101 v1(71.3,101.2) ; v2(74.9,70.9) 74.9,60.52 U2.16@74.92,60.5 74.92,58.82 82.56,58.82 ; U11.10@75.11,44.7 75.11,43.01 ; U4.10@76.99,104.1 v1(76.99,101.2) 78.49,99.7 84.61,99.7 84.61,100.2 ; U13.16@80.11,44.7 80.11,43.01 ; U2.10@82.54,60.5 82.54,58.84 82.56,58.82 ; U4.16@84.61,104.1 84.61,100.2 ; C3.1@87.1,105.484 87.1,100.2 ; U13.10@87.73,44.7 87.716,44.686 87.716,43.016 88.7,43.016 ; 90.184,58.816 C9.1@86.4,58.816 83.3,58.816 83.296,58.82 82.56,58.82 ; U9.16@90.29,60.5 90.29,58.81 90.3,58.8 97.9,58.8 ; U8.10@90.86,104 90.86,100.2 ; v1(91.7,44.7) C10.1@91.7,43.016 88.7,43.016 ; v1(94.9,46.4) 94.9,46.2 95.32,45.78 U7.16@95.32,44.7 95.32,42.9 v1(98.3,42.9) ; U9.10@97.91,60.5 97.9,60.49 97.9,58.8 ; U8.16@98.48,104 98.48,101 ; v1(100,42.9) 102.9,42.9 102.91,42.91 ; U7.10@102.94,44.7 102.91,44.67 102.91,42.91 ; U6.10@103.12,103.9 103.12,101 ; U1.16@105.29,60.6 105.29,58.71 ; 107.99,42.9 v1(110.8,42.9) ; U3.16@107.99,44.6 107.99,42.91 102.91,42.91 ; U6.16@110.74,103.9 110.74,101.1 110.7,101.1 110.6,101 103.12,101 ; 110.88,101 113.6,101 ; v1(112.7,42.9) 115.61,42.9 ; U1.10@112.91,60.6 112.91,58.73 112.89,58.71 ; C4.1@113.5,105.384 113.5,101.1 113.6,101 ; U3.10@115.61,44.6 115.61,42.9 ; U14.10@117.46,104 117.52,103.94 117.52,101 113.6,101 ; 117.52,100.82 125.08,100.82 U14.16@125.08,104 125.38,103.7 v2(127.5,103.7) ; v2(119,42.9) 115.61,42.9 ; v2(119,58.7) 112.9,58.7 112.89,58.71 ; XN2.31@125.5,133.1 125.5,128 126.75,128 ; XN2.32@126.75,133.1 126.75,128 ; C2.1@127.5,114.616 132.306,114.616 C17.1@132.7,115.01 ; R109.1@144.4,89.143 144.4,97.4 143.1,98.7 143.1,101.985 L3.1@143.215,102.1 143.215,109.485 137.69,115.01 C17.1@132.7,115.01 ; 59.816,42.916 C8.1@64.2,42.916 64.274,42.99 67.49,42.99 ; 67.49,42.99 67.51,43.01 75.11,43.01 ; 75.11,43.01 80.11,43.01 ; 80.11,43.01 88.694,43.01 88.7,43.016 ; 84.61,100.2 87.1,100.2 ; 87.1,100.2 90.86,100.2 ; 90.86,100.2 98.48,100.2 98.48,101 ; 97.9,58.8 99.3,58.8 99.884,58.216 C11.1@102.4,58.216 103.516,58.216 104.01,58.71 105.29,58.71 ; 98.48,101 103.12,101 ; 105.29,58.71 112.89,58.71 ; 126.75,128 126.75,124.35 132.7,118.4 C17.1@132.7,115.01
  Bottom w0.5: v1(22.2,93.5) 42.5,93.5 v1(53.3,82.7) ; v1(23,60.3) 39.1,60.3 47.42,68.62 v1(53.3,68.62) ; v1(58.7,101.2) v1(62.6,101.2) ; X2.4@61.4,71.16 X2.3@61.4,68.62 69.72,68.62 71.74,70.64 ; v1(71.3,101.2) v1(76.99,101.2) ; v2(72.1,71) 72.2,70.9 v2(74.9,70.9) ; v1(91.7,44.7) 93.2,44.7 v1(94.9,46.4) ; v1(98.3,42.9) v1(100,42.9) ; v1(110.8,42.9) v1(112.7,42.9) ; v2(119,42.9) v2(119,58.7) ; v2(127.5,103.7) 127.5,109.81 C17.1@132.7,115.01
X1: U1.15 XN1.3 | length 124.6
  Top w0.3: v1(46.1,113.8) XN1.3@46.1,133.1 ; v1(106.3,62.1) 106.3,60.86 U1.15@106.56,60.6 ; v1(106.4,72.3) v1(106.4,88.9)
  Bottom w0.3: v1(46.1,113.8) 46.1,104.4 55,95.5 101,95.5 106.4,90.1 v1(106.4,88.9) ; v1(106.3,62.1) 106.3,72.2 v1(106.4,72.3)
X2: U1.1 XN4.29 | length 97.6
  Top w0.3: v1(47.2,19.7) 47.25,19.65 XN4.29@47.25,14 ; v1(83.3,19.5) 83.5,19.7 v1(83.5,25.6) ; U1.1@105.29,55.2 105.3,55.19 v1(105.3,53.1)
  Bottom w0.3: v1(47.2,19.7) 47.4,19.5 v1(83.3,19.5) ; v1(83.5,25.6) 84.2,25.6 85.5,26.9 103.3,26.9 105.3,28.9 v1(105.3,53.1)
X3: U1.2 XN4.30 | length 99.4
  Top w0.3: v1(45.9,18.7) 45.9,14.1 XN4.30@46,14 ; v1(84.3,24.7) 84.4,24.6 v1(84.4,18.7) ; v1(106.5,53.1) 106.56,53.16 U1.2@106.56,55.2
  Bottom w0.3: v1(45.9,18.7) v1(84.4,18.7) ; v1(84.3,24.7) 84.4,24.7 85.9,26.2 103.6,26.2 106.5,29.1 v1(106.5,53.1)
X4: U1.3 XN1.4 | length 134.5
  Top w0.3: XN1.4@47.35,133.1 47.35,114.35 v1(47.4,114.3) ; v1(107.4,71.6) v1(107.4,89.9) ; v1(107.8,53.1) 107.8,55.03 107.9,55.13 U1.3@107.83,55.2
  Bottom w0.3: v1(47.4,114.3) 47.4,103.9 55.2,96.1 101.2,96.1 v1(107.4,89.9) ; v1(107.4,71.6) 107,71.2 107,62.7 107.8,61.9 v1(107.8,53.1)
X5: U1.4 XN3.1 | length 56.3
  Top w0.3: U1.4@109.1,55.2 109.1,56.7 110.3,57.9 114.6,57.9 117.6,54.9 117.6,49.3 125.4,41.5 125.4,19.4 126.7,18.1 XN3.1@126.7,14.1
X6: U1.5 XN3.2 | length 53.5
  Top w0.3: U1.5@110.37,55.2 110.37,56.87 110.7,57.2 114.3,57.2 117,54.5 117,49.1 124.8,41.3 124.8,18.9 125.45,18.25 XN3.2@125.45,14.1
X7: U1.6 XN3.3 | length 48
  Top w0.3: v1(111.6,53.1) 111.64,53.14 U1.6@111.64,55.2 ; v1(111.64,50.8) 114.5,50.8 121.06,44.24 124.2,41.1 XN3.3@124.2,14.1
  Bottom w0.3: v1(111.6,53.1) 111.64,53.06 v1(111.64,50.8)
X8: U1.7 XN2.30 | length 92.5
  Top w0.4: v1(108.5,71.7) v1(108.5,89.9) v1@108.5,90 ; v1(112.9,53.6) 112.9,55.19 U1.7@112.91,55.2 ; v1(124.2,127.5) 124.25,127.55 XN2.30@124.25,133.1
  Bottom w0.4: v1(108.5,71.7) 108.5,58 v1(112.9,53.6) ; v1(108.5,89.9) 114.4,95.8 118.9,95.8 124.6,101.5 124.6,117 124.2,117.4 v1(124.2,127.5)
pads on no net: DD2.2 DD2.6 DD2.9 U3.4 U3.5 U3.6 U3.7 U14.9 XN1.6 XN3.4 XN3.5 XN4.31 XN4.32

## Polygon pours and split planes (outlines as drawn)
GND on Bottom "GND_BOTTOM" (hatched 90Degree grid 0.508 track 0.203, remove dead copper, pour order 0): 38.5,138.5 38.7,138.7 129.5,138.7 146.6,121.6 146.4,121.4 146.4,25.6 131.6,10.8 38.5,10.8 21.3,28 21.3,121.705

## Other copper
Bottom:
  pour cut-out: 34.2,110.4 42.551,110.4 42.551,116.228 34.2,116.228
  pour cut-out: 42.4,95.9 50.751,95.9 50.751,101.728 42.4,101.728
  pour cut-out: 17.1,102.2 17.1,86.7 22.7,81.1 41.8,81.1 41.8,87 24.9,87 23,88.9 23,102.2

## Silkscreen, mask and mechanical layers (free items; w line width, h text height)
Top Overlay:
  text "Flame Clock 1.1" at 21.6,35.6 h2
Board:
  lines w0.2: 15.7,4.2 154.4,4.2 154.4,143.2 15.7,143.2 15.7,4.2

## Text inside footprints (layer, text, board x,y; h text height)
XN1: Top Overlay "32" at 80.9,136.8 h1.52; Top Overlay "1" at 43.4,136.6 h1.52
XN2: Top Overlay "32" at 125.7,136.6 h1.52; Top Overlay "1" at 87.7,136.7 h1.52
XN3: Top Overlay "32" at 89.4,10.3 h1.52 r180; Top Overlay "1" at 126.9,10.6 h1.52 r180
XN4: Top Overlay "32" at 44.4,10 h1.52 r180; Top Overlay "1" at 82.5,10.4 h1.52 r180